# EAGLE board Meter-Daughterboard-Output-v22AM (EAGLE 5.10)
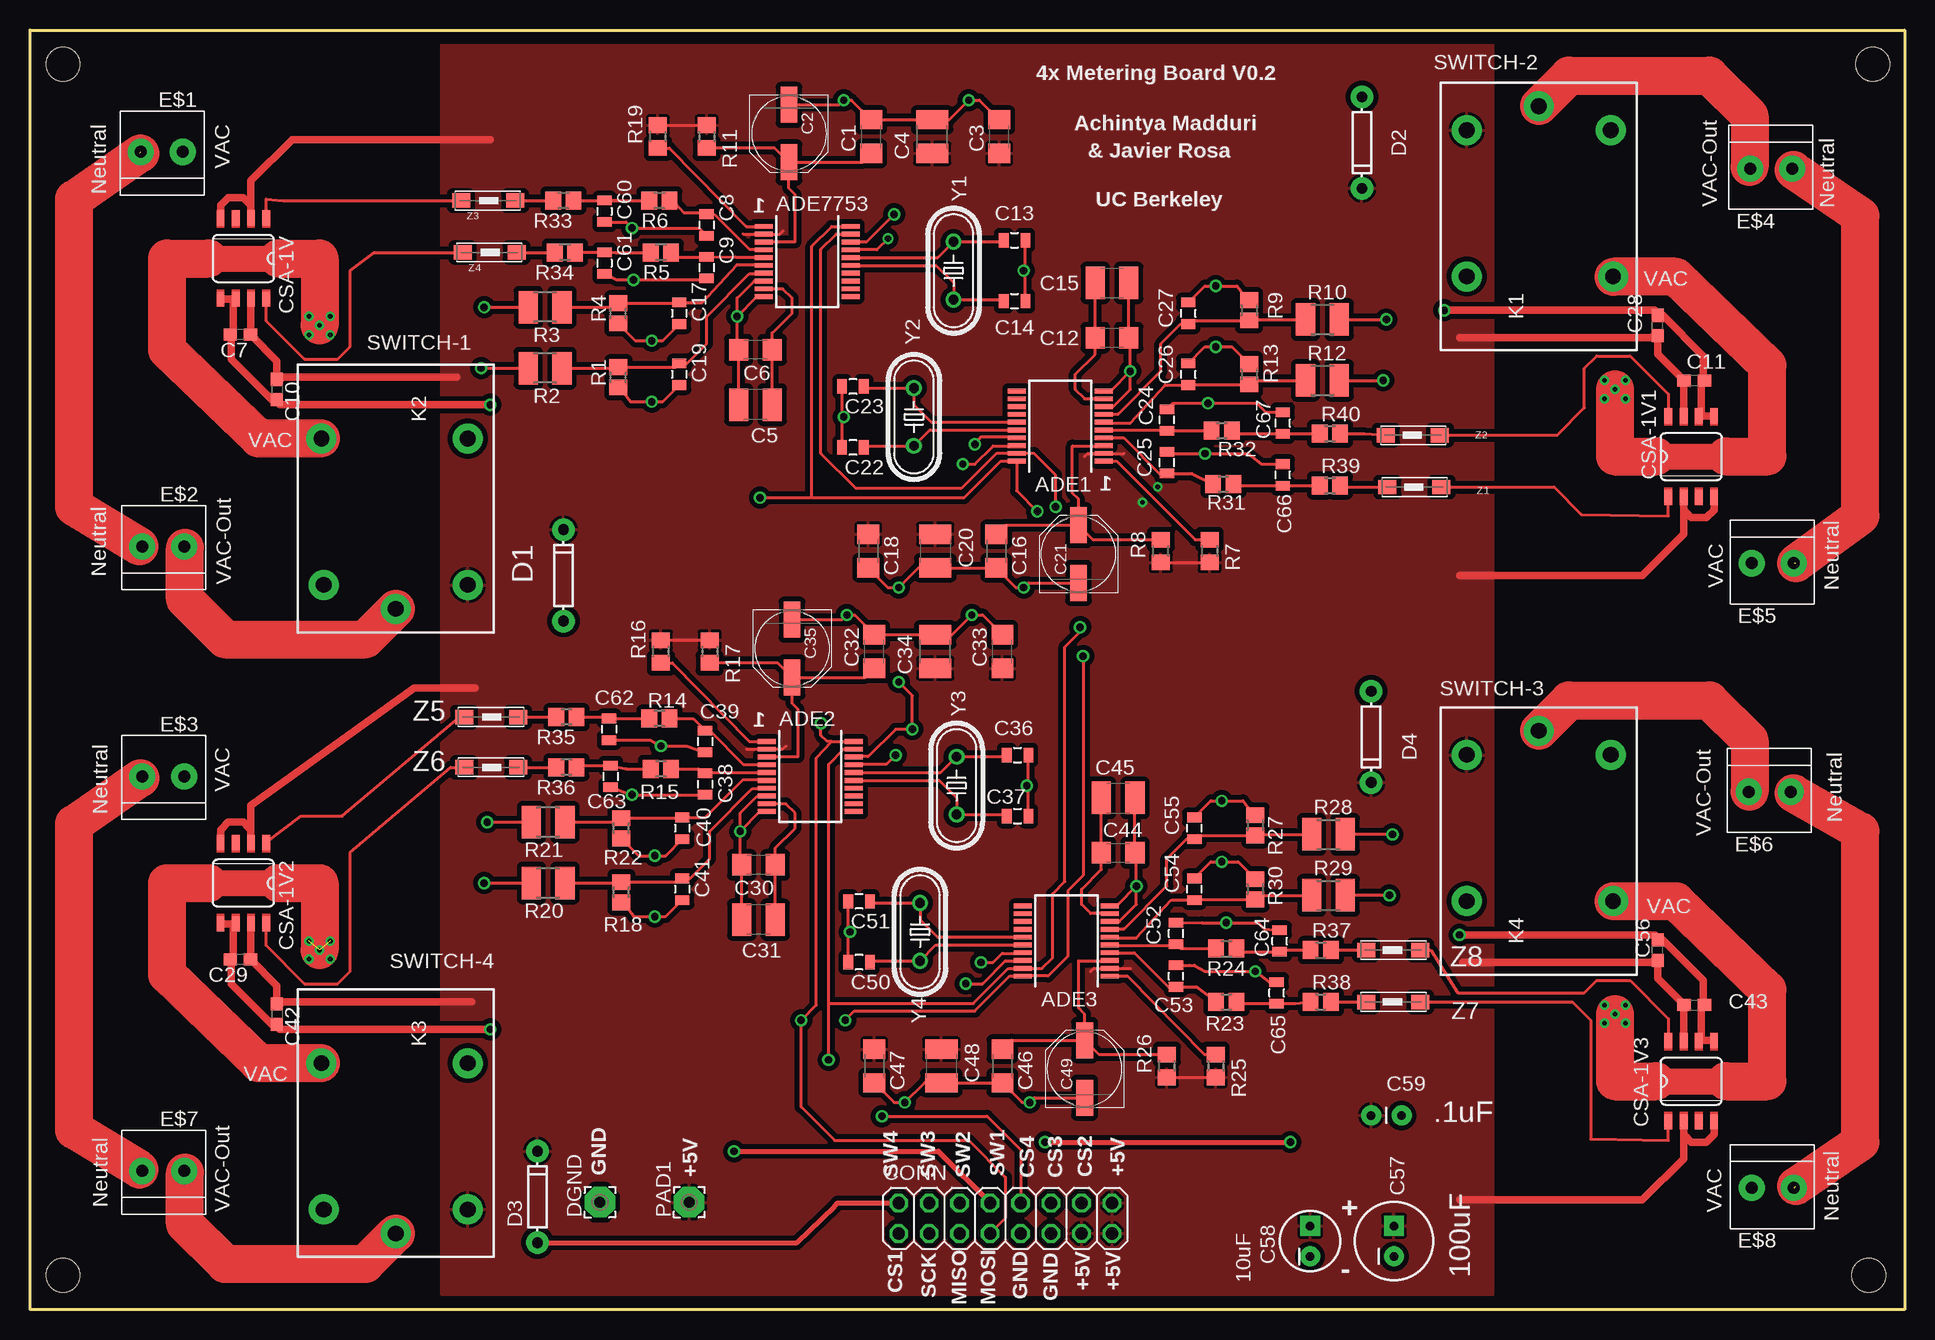
[diagram p0: board, top side]
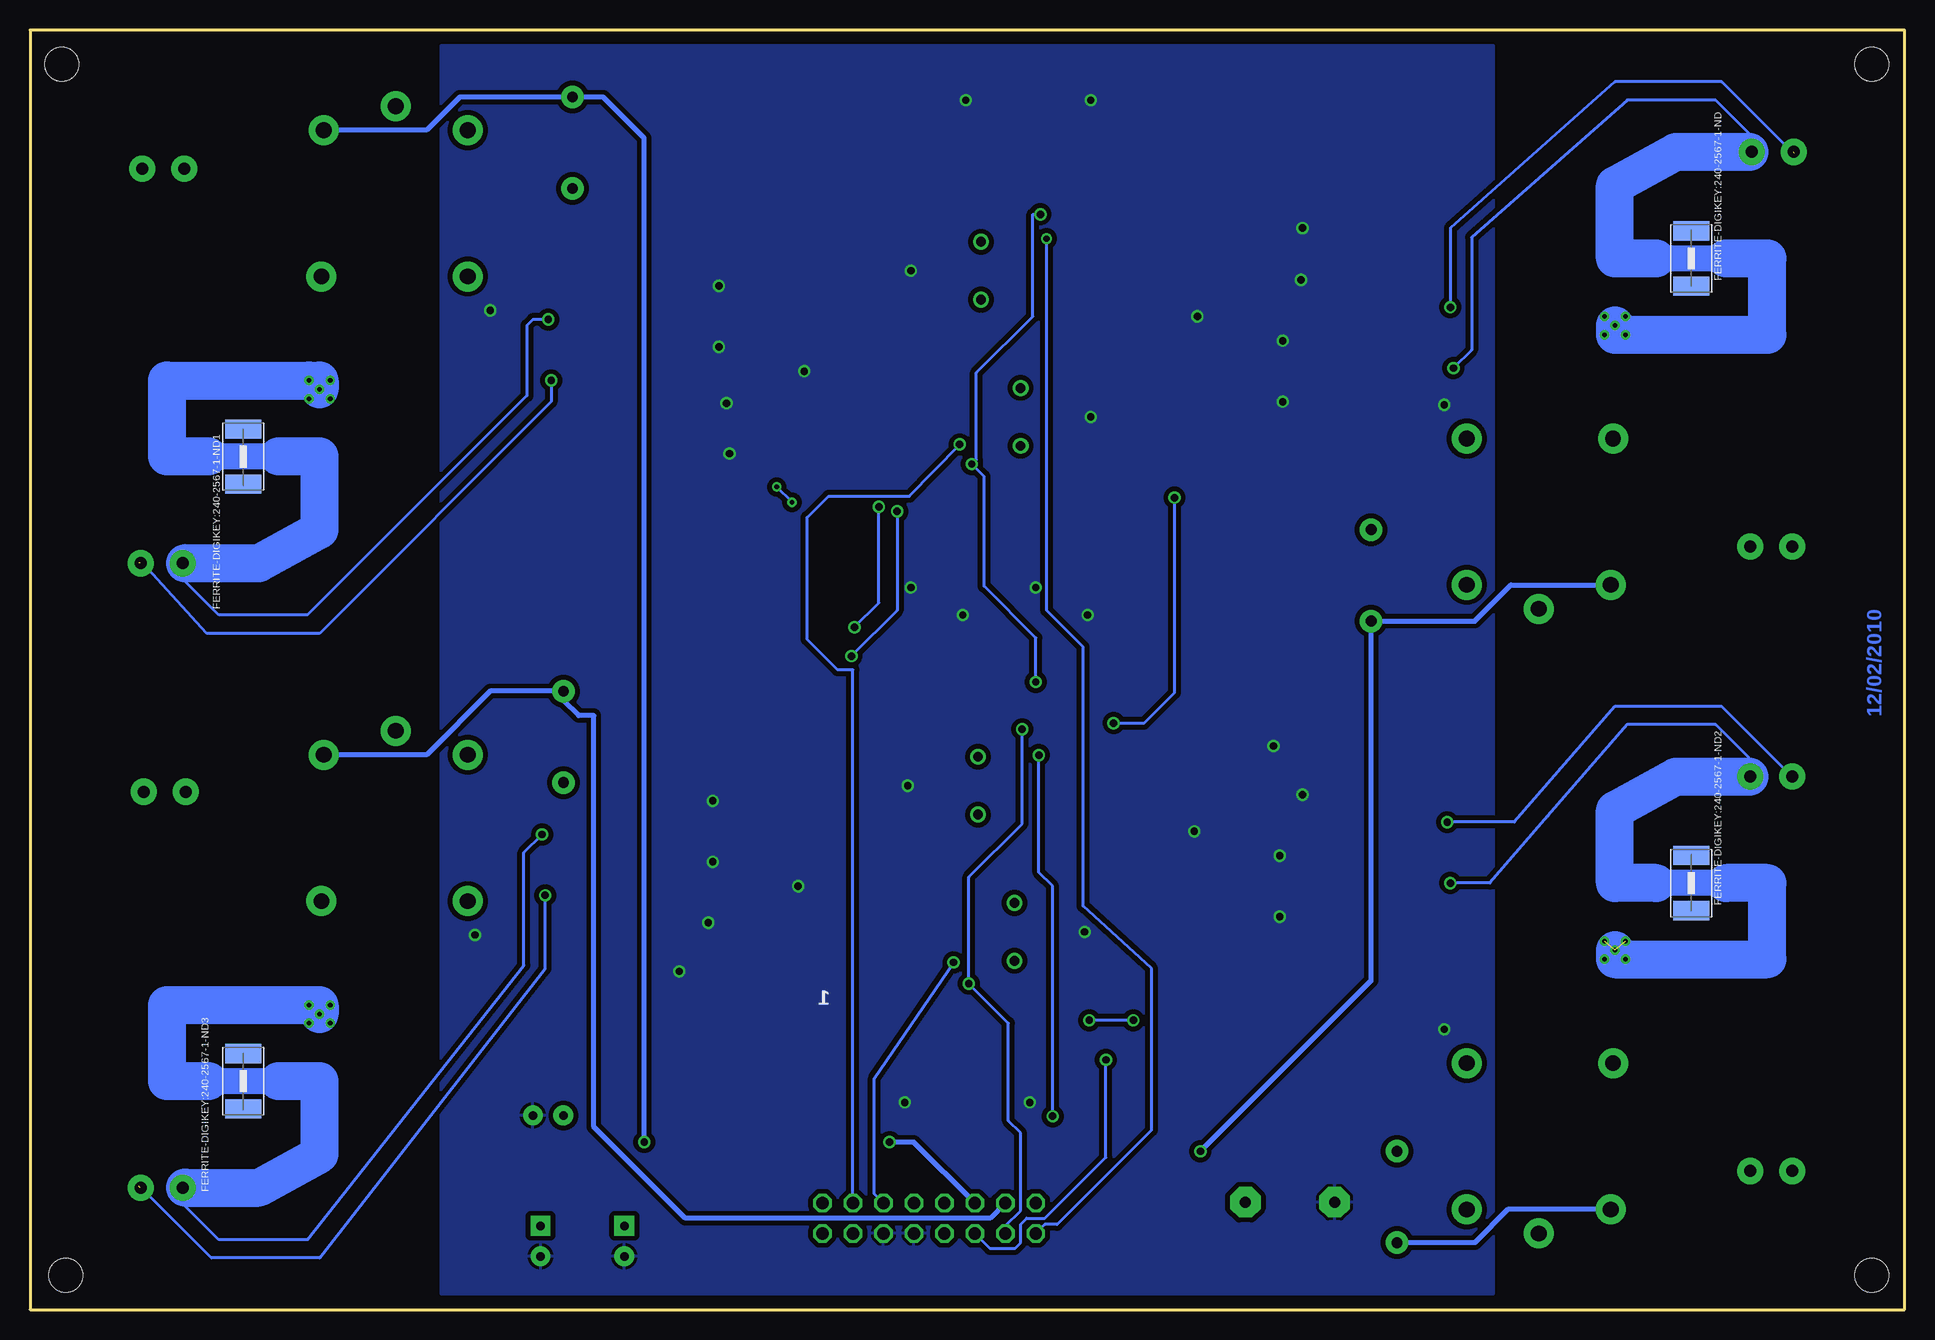
[diagram p1: board, bottom side, seen from below]

Size 156.21 x 106.68 mm. Coordinates in mm from the lower left corner, seen from the top.
Outline: 0,0 0,106.68 156.21,106.68 156.21,0 0,0
Copper layers (1*16): Top 0.035mm / dielectric 1.5mm / Bottom 0.035mm
Design rules "default *": minimum track width 10mil, minimum drill 15mil, track to track 8mil, track to pad 8mil, pad to pad 8mil, via to via 8mil, smd to smd 8mil, copper to edge 40mil, drill to drill 8mil, minimum pad ring 10mil, minimum via ring 8mil, stop-mask expansion 4mil, vias tented up to drill 0mil, thermal gap 10mil
Holes 2.8 mm at 2.74,103.84 2.74,2.87 153.56,103.84 153.24,2.87

## Footprints (pad centres in the part's own frame; a part is rotated, then mirrored left to right if it is on the bottom)
SSOP20 = smd 0.4 x 1.5: 1 -2.925,-3.625; 2 -2.275,-3.625; 3 -1.625,-3.625; 4 -0.975,-3.625; 5 -0.325,-3.625; 6 0.325,-3.625; 7 0.975,-3.625; 8 1.625,-3.625; 9 2.275,-3.625; 10 2.925,-3.625; 11 2.925,3.625; 12 2.275,3.625; 13 1.625,3.625; 14 0.975,3.625; 15 0.325,3.625; 16 -0.325,3.625; 17 -0.975,3.625; 18 -1.625,3.625; 19 -2.275,3.625; 20 -2.925,3.625
C1206 = smd 1.6 x 1.8: 1 -1.4,0; 2 1.4,0
PANASONIC_D = smd 3 x 1.4: + 2.4,0; - -2.4,0
C1210 = smd 1.6 x 2.7: 1 -1.4,0; 2 1.4,0
C0603 = smd 1.1 x 1: 1 -0.85,0; 2 0.85,0
0805 = smd 0.8 x 1.2: 1 -0.9,0; 2 0.9,0
CPOL-RADIAL-100UF-25V = drill 0.7 pad 1.651 square: 1 1.27,0 | drill 0.7 pad 1.651 round: 2 -1.27,0
CPOL-RADIAL-10UF-25V = drill 0.7 pad 1.651 square: 1 1.27,0 | drill 0.7 pad 1.651 round: 2 -1.27,0
CAP-PTH-SMALL = drill 0.7 pad 1.651 round: 1 0,0; 2 2.54,0
2X08 = drill 1.016 octagon: 1 -8.89,-1.27; 2 -8.89,1.27; 3 -6.35,-1.27; 4 -6.35,1.27; 5 -3.81,-1.27; 6 -3.81,1.27; 7 -1.27,-1.27; 8 -1.27,1.27; 9 1.27,-1.27; 10 1.27,1.27; 11 3.81,-1.27; 12 3.81,1.27; 13 6.35,-1.27; 14 6.35,1.27; 15 8.89,-1.27; 16 8.89,1.27
SOIC8 = smd 0.66 x 1.27: 1 -1.905,-3.391; 2 -0.635,-3.391; 3 0.635,-3.391; 4 1.905,-3.391; 5 1.905,3.391; 6 0.635,3.391; 7 -0.635,3.391; 8 -1.905,3.391
DIODE-1N4148 = drill 0.9 pad 1.88 round: A -3.81,0; C 3.81,0
2,54/0,9 = drill 0.914 pad 2.54 octagon: 1 0,0
3.5MMTERM = drill 1 pad 2.184 round: 1 1.8,0; 2 -1.7,0
1812 = smd 1.6 x 3: 1 -2.3,0; 2 2.3,0
ZN5 = drill 1.3 pad 2.5 round: 11 8.89,0; 12 -5.31,-6.2; 14 -5.31,6; A1 6.89,6; A2 6.89,-6
R0805 = smd 1.3 x 1.5: 1 -0.85,0; 2 0.85,0
R1210 = smd 1.6 x 2.7: 1 -1.4,0; 2 1.4,0
R0805' = smd 1.3 x 1.5: 1 -0.95,0; 2 0.95,0
HC49/S = drill 0.813 round: 1 -2.413,0; 2 2.413,0
1806 = smd 1.5 x 1.2: 1 -2.3,0; 2 2.2,0

## Placement (x,y rotation side)
ADE1  ADE7753ARSZ-ND  [SSOP20]  85.85,73.66 90 top
ADE2  ADE7753ARSZ-ND  [SSOP20]  65.02,44.45 270 top
ADE3  ADE7753ARSZ-ND  [SSOP20]  86.36,30.73 90 top
ADE7753  ADE7753ARSZ-ND  [SSOP20]  64.77,87.38 270 top
C1  100n : 399-1249-1-ND  [C1206]  70.1,97.79 90 top
C2  220u : PCE3310CT-ND  [PANASONIC_D]  63.25,98.04 270 top
C3  100n : 399-1249-1-ND  [C1206]  80.77,97.79 90 top
C4  10u : 478-1625-1-ND  [C1210]  75.18,97.79 90 top
C5  10u : 478-1625-1-ND  [C1210]  60.45,75.44 180 top
C6  100n : 399-1249-1-ND  [C1206]  60.45,80.01 180 top
C7  0.1uF : ECJ-1VB1C104K  [C0603]  17.53,81.28 180 top
C8  15nF: PCC1992CT-ND  [0805]  56.39,90.42 270 top
C9  15nF: PCC1992CT-ND  [0805]  56.39,86.87 270 top
C10  0.1uF : ECJ-1VB1C104K  [C0603]  20.57,76.71 270 top
C11  0.1uF : ECJ-1VB1C104K  [C0603]  138.68,77.47 0 top
C12  100n : 399-1249-1-ND  [C1206]  90.17,81.03 0 top
C13  22p : PCC220CNCT-ND  [0805]  82.04,89.15 0 top
C14  22p : PCC220CNCT-ND  [0805]  82.04,84.07 0 top
C15  10u : 478-1625-1-ND  [C1210]  90.17,85.6 0 top
C16  100n : 399-1249-1-ND  [C1206]  80.52,63.25 270 top
C17  15nF: PCC1992CT-ND  [0805]  54.1,83.06 270 top
C18  100n : 399-1249-1-ND  [C1206]  69.85,63.25 270 top
C19  15nF: PCC1992CT-ND  [0805]  54.1,77.98 270 top
C20  10u : 478-1625-1-ND  [C1210]  75.44,63.25 270 top
C21  220u : PCE3310CT-ND  [PANASONIC_D]  87.38,62.99 90 top
C22  22p : PCC220CNCT-ND  [0805]  68.58,71.88 180 top
C23  22p : PCC220CNCT-ND  [0805]  68.58,76.96 180 top
C24  15nF: PCC1992CT-ND  [0805]  94.74,74.17 90 top
C25  15nF: PCC1992CT-ND  [0805]  94.74,70.61 90 top
C26  15nF: PCC1992CT-ND  [0805]  96.52,77.98 90 top
C27  15nF: PCC1992CT-ND  [0805]  96.52,83.06 90 top
C28  0.1uF : ECJ-1VB1C104K  [C0603]  135.64,82.04 90 top
C29  0.1uF : ECJ-1VB1C104K  [C0603]  17.53,29.21 180 top
C30  100n : 399-1249-1-ND  [C1206]  60.71,37.08 180 top
C31  10u : 478-1625-1-ND  [C1210]  60.71,32.51 180 top
C32  100n : 399-1249-1-ND  [C1206]  70.36,54.86 90 top
C33  100n : 399-1249-1-ND  [C1206]  81.03,54.86 90 top
C34  10u : 478-1625-1-ND  [C1210]  75.44,54.86 90 top
C35  220u : PCE3310CT-ND  [PANASONIC_D]  63.5,55.12 270 top
C36  22p : PCC220CNCT-ND  [0805]  82.3,46.23 0 top
C37  22p : PCC220CNCT-ND  [0805]  82.3,41.15 0 top
C38  15nF: PCC1992CT-ND  [0805]  56.26,43.81 270 top
C39  15nF: PCC1992CT-ND  [0805]  56.26,47.37 270 top
C40  15nF: PCC1992CT-ND  [0805]  54.36,40.13 270 top
C41  15nF: PCC1992CT-ND  [0805]  54.36,35.05 270 top
C42  0.1uF : ECJ-1VB1C104K  [C0603]  20.57,24.64 270 top
C43  0.1uF : ECJ-1VB1C104K  [C0603]  138.68,25.4 0 top
C44  100n : 399-1249-1-ND  [C1206]  90.68,38.1 0 top
C45  10u : 478-1625-1-ND  [C1210]  90.68,42.67 0 top
C46  100n : 399-1249-1-ND  [C1206]  81.03,20.32 270 top
C47  100n : 399-1249-1-ND  [C1206]  70.36,20.32 270 top
C48  10u : 478-1625-1-ND  [C1210]  75.95,20.32 270 top
C49  220u : PCE3310CT-ND  [PANASONIC_D]  87.88,20.07 90 top
C50  22p : PCC220CNCT-ND  [0805]  69.09,28.96 180 top
C51  22p : PCC220CNCT-ND  [0805]  69.09,34.04 180 top
C52  15nF: PCC1992CT-ND  [0805]  95.5,31.37 90 top
C53  15nF: PCC1992CT-ND  [0805]  95.5,27.81 90 top
C54  15nF: PCC1992CT-ND  [0805]  97.03,35.05 90 top
C55  15nF: PCC1992CT-ND  [0805]  97.03,40.13 90 top
C56  0.1uF : ECJ-1VB1C104K  [C0603]  135.64,29.97 90 top
C57  100 uF: P5152-ND  [CPOL-RADIAL-100UF-25V]  113.67,5.71 90 top
C58  10 uF: P5148-ND  [CPOL-RADIAL-10UF-25V]  106.68,5.71 90 top
C59  .1 uF: BC1148TR-ND  [CAP-PTH-SMALL]  111.76,16.19 0 top
C60  15nF: PCC1992CT-ND  [0805]  47.88,91.57 270 top
C61  15nF: PCC1992CT-ND  [0805]  47.88,87.25 270 top
C62  15nF: PCC1992CT-ND  [0805]  48.26,48.39 270 top
C63  15nF: PCC1992CT-ND  [0805]  48.39,44.45 270 top
C64  15nF: PCC1992CT-ND  [0805]  104.14,30.73 90 top
C65  15nF: PCC1992CT-ND  [0805]  103.89,26.42 90 top
C66  15nF: PCC1992CT-ND  [0805]  104.39,69.6 90 top
C67  15nF: PCC1992CT-ND  [0805]  104.39,73.91 90 top
CONN  [2X08]  81.28,7.62 0 top
CSA-1V  CSA-1V  [SOIC8]  17.78,87.63 180 top
CSA-1V1  CSA-1V  [SOIC8]  138.43,71.12 0 top
CSA-1V2  CSA-1V  [SOIC8]  17.78,35.56 180 top
CSA-1V3  CSA-1V  [SOIC8]  138.43,19.05 0 top
D1  [DIODE-1N4148]  44.45,61.21 90 top
D2  [DIODE-1N4148]  111,97.28 270 top
D3  [DIODE-1N4148]  42.29,9.4 90 top
D4  [DIODE-1N4148]  111.76,47.75 270 top
DGND  1031K-ND  [2,54/0,9]  47.5,8.95 90 top
E$1  [3.5MMTERM]  10.92,96.52 0 top
E$2  [3.5MMTERM]  11.05,63.63 0 top
E$3  [3.5MMTERM]  11.05,44.45 0 top
E$4  [3.5MMTERM]  145.16,95.12 180 top
E$5  [3.5MMTERM]  145.29,62.23 180 top
E$6  [3.5MMTERM]  145.03,43.18 180 top
E$7  [3.5MMTERM]  11.05,11.56 0 top
E$8  [3.5MMTERM]  145.29,10.16 180 top
FERRITE-DIGIKEY:240-2567-1-ND  1812  [1812]  17.78,87.63 90 bottom
FERRITE-DIGIKEY:240-2567-1-ND1  1812  [1812]  138.43,71.12 270 bottom
FERRITE-DIGIKEY:240-2567-1-ND2  1812  [1812]  17.78,35.56 90 bottom
FERRITE-DIGIKEY:240-2567-1-ND3  1812  [1812]  138.43,19.05 270 bottom
K1  ZNS5106  [ZN5]  125.73,91.44 90 top
K2  ZNS5106  [ZN5]  30.48,67.31 270 top
K3  ZNS5106  [ZN5]  30.48,15.24 270 top
K4  ZNS5106  [ZN5]  125.73,39.37 90 top
PAD1  1031K-ND  [2,54/0,9]  54.93,8.95 90 top
R1  1K : RHM1.00KAECT-ND  [R0805]  49.02,77.72 90 top
R2  1.0M: P1.00MAACT-ND  [R1210]  42.93,78.49 180 top
R3  1.0M: P1.00MAACT-ND  [R1210]  42.93,83.57 180 top
R4  1K : RHM1.00KAECT-ND  [R0805]  49.02,83.06 90 top
R5  1K : RHM1.00KAECT-ND  [R0805]  52.58,88.14 180 top
R6  1K : RHM1.00KAECT-ND  [R0805]  52.45,92.46 180 top
R7  10K : 541-10.0KCCT-ND  [R0805']  98.3,63.25 270 top
R8  10 : P10.0CCT-ND  [R0805']  94.23,63.25 90 top
R9  1K : RHM1.00KAECT-ND  [R0805]  101.6,83.31 270 top
R10  1.0M: P1.00MAACT-ND  [R1210]  107.7,82.55 0 top
R11  10 : P10.0CCT-ND  [R0805']  56.39,97.79 270 top
R12  1.0M: P1.00MAACT-ND  [R1210]  107.7,77.47 0 top
R13  1K : RHM1.00KAECT-ND  [R0805]  101.6,77.98 270 top
R14  1K : RHM1.00KAECT-ND  [R0805]  52.45,49.28 180 top
R15  1K : RHM1.00KAECT-ND  [R0805]  52.58,45.09 180 top
R16  10K : 541-10.0KCCT-ND  [R0805']  52.58,54.86 90 top
R17  10 : P10.0CCT-ND  [R0805']  56.64,54.86 270 top
R18  1K : RHM1.00KAECT-ND  [R0805]  49.28,34.8 90 top
R19  10K : 541-10.0KCCT-ND  [R0805']  52.32,97.79 90 top
R20  1.0M: P1.00MAACT-ND  [R1210]  43.18,35.56 180 top
R21  1.0M: P1.00MAACT-ND  [R1210]  43.18,40.64 180 top
R22  1K : RHM1.00KAECT-ND  [R0805]  49.28,40.13 90 top
R23  1K : RHM1.00KAECT-ND  [R0805]  99.69,25.65 0 top
R24  1K : RHM1.00KAECT-ND  [R0805]  99.69,30.1 0 top
R25  10K : 541-10.0KCCT-ND  [R0805']  98.81,20.32 270 top
R26  10 : P10.0CCT-ND  [R0805']  94.74,20.32 90 top
R27  1K : RHM1.00KAECT-ND  [R0805]  102.11,40.39 270 top
R28  1.0M: P1.00MAACT-ND  [R1210]  108.2,39.62 0 top
R29  1.0M: P1.00MAACT-ND  [R1210]  108.2,34.54 0 top
R30  1K : RHM1.00KAECT-ND  [R0805]  102.11,35.05 270 top
R31  1K : RHM1.00KAECT-ND  [R0805]  99.44,68.83 0 top
R32  1K : RHM1.00KAECT-ND  [R0805]  99.31,73.28 0 top
R33  1K : RHM1.00KAECT-ND  [R0805]  44.45,92.46 180 top
R34  1K : RHM1.00KAECT-ND  [R0805]  44.58,88.14 180 top
R35  1K : RHM1.00KAECT-ND  [R0805]  44.7,49.4 180 top
R36  1K : RHM1.00KAECT-ND  [R0805]  44.7,45.21 180 top
R37  1K : RHM1.00KAECT-ND  [R0805]  107.57,29.97 0 top
R38  1K : RHM1.00KAECT-ND  [R0805]  107.57,25.65 0 top
R39  1K : RHM1.00KAECT-ND  [R0805]  108.33,68.71 0 top
R40  1K : RHM1.00KAECT-ND  [R0805]  108.33,73.03 0 top
Y1  3.579M : X079-ND  [HC49/S]  76.96,86.61 270 top
Y2  3.579M : X079-ND  [HC49/S]  73.66,74.42 90 top
Y3  3.579M : X079-ND  [HC49/S]  77.22,43.69 270 top
Y4  3.579M : X079-ND  [HC49/S]  74.17,31.5 90 top
Z1  240-2418-1-ND  [1806]  115.32,68.58 180 top
Z2  240-2418-1-ND  [1806]  115.19,72.9 180 top
Z3  240-2418-1-ND  [1806]  38.23,92.46 0 top
Z4  240-2418-1-ND  [1806]  38.35,88.14 0 top
Z5  240-2418-1-ND  [1806]  38.48,49.4 0 top
Z6  240-2418-1-ND  [1806]  38.48,45.21 0 top
Z7  240-2418-1-ND  [1806]  113.54,25.65 180 top
Z8  240-2418-1-ND  [1806]  113.54,29.97 180 top

## Library data of the parts
ADE1-ADE3 ADE7753 CSA-1V CSA-1V1-CSA-1V3 = ACMeterEagle
C1-C7 C10-C12 C15 C16 C18 C20 C21 C28-C35 C42-C49 C56 R7 R8 R11 R16 R17 R19 R25 R26 = rcl
C8 C9 C13 C14 C17 C19 C22-C27 C36-C41 C50-C55 C60-C67 = SparkFunEagle-6-6-07
C57-C59 D1-D4 = SparkFun
CONN = pinhead
DGND PAD1 = wirepad
E$1-E$8 R2 R3 R10 R12 R20 R21 R28 R29 = adafruit
FERRITE-DIGIKEY:240-2567-1-ND FERRITE-DIGIKEY:240-2567-1-ND1-FERRITE-DIGIKEY:240-2567-1-ND3 Z1-Z8 = wuerth-elektronik
K1-K4 = relay
R1 R4-R6 R9 R13-R15 R18 R22-R24 R27 R30-R40 = resistor
Y1-Y4 = crystal

## Nets
A-OUT: CSA-1V.1 Z3.1
A-OUT1: CSA-1V1.1 Z1.1
A-OUT2: CSA-1V2.1 Z5.1
A-OUT3: CSA-1V3.1 Z7.1
AVDD: ADE7753.3 C1.1 C2.+ R11.2
AVDD1: ADE1.3 C16.1 C21.+ R8.2
AVDD2: ADE2.3 C32.1 C35.+ R17.2
AVDD3: ADE3.3 C46.1 C49.+ R26.2
CO-COM: CSA-1V.8 Z4.1
CO-COM1: CSA-1V1.8 Z2.1
CO-COM2: CSA-1V2.8 Z6.1
CO-COM3: CSA-1V3.8 Z8.1
CS1: ADE7753.17 CONN.1
CS2: ADE1.17 CONN.14
CS3: ADE3.17 CONN.12
CS4: ADE2.17 CONN.10
DGND: ADE1.8 ADE1.10 ADE2.8 ADE2.10 ADE3.8 ADE3.10 ADE7753.8 ADE7753.10 C1.2 C2.- C3.2 C4.2 C5.2 C6.2 C7.2 C8.2 C9.2 C10.2 C11.2 C12.2 C13.2 C14.2 C15.2 C16.2 C17.2 C18.2 C19.2 C20.2 C21.- C22.2 C23.2 C24.2 C25.2 C26.2 C27.2 C28.2 C29.2 C30.2 C31.2 C32.2 C33.2 C34.2 C35.- C36.2 C37.2 C38.2 C39.2 C40.2 C41.2 C42.2 C43.2 C44.2 C45.2 C46.2 C47.2 C48.2 C49.- C50.2 C51.2 C52.2 C53.2 C54.2 C55.2 C56.2 C57.2 C58.2 C59.2 C60.2 C61.2 C62.2 C63.2 C64.2 C65.2 C66.2 C67.2 CONN.9 CONN.11 CSA-1V1.5 CSA-1V1.6 CSA-1V2.5 CSA-1V2.6 CSA-1V3.5 CSA-1V3.6 CSA-1V.5 CSA-1V.6 DGND.1 R1.1 R4.1 R9.1 R13.1 R18.1 R22.1 R27.1 R30.1
MISO: ADE1.19 ADE2.19 ADE3.19 ADE7753.19 CONN.5
MOSI: ADE1.20 ADE2.20 ADE3.20 ADE7753.20 CONN.7
N$1: C60.1 R6.2 R33.1
N$3: R34.2 Z4.2
N$4: ADE1.16 C22.1 Y2.1
N$7: ADE1.15 C23.1 Y2.2
N$8: R39.2 Z1.2
N$9: R40.2 Z2.2
N$10: ADE7753.16 C13.1 Y1.1
N$11: ADE7753.15 C14.1 Y1.2
N$15: ADE2.16 C36.1 Y3.1
N$16: ADE2.15 C37.1 Y3.2
N$17: R35.2 Z5.2
N$18: R36.2 Z6.2
N$22: ADE3.16 C50.1 Y4.1
N$23: ADE3.15 C51.1 Y4.2
N$24: R38.2 Z7.2
N$25: R37.2 Z8.2
NEUTRAL: E$1.2 R3.2
NEUTRAL1: R12.2
NEUTRAL3: R29.2
REF: ADE7753.9 C5.1 C6.1
REF1: ADE1.9 C12.1 C15.1
REF2: ADE2.9 C30.1 C31.1
REF3: ADE3.9 C44.1 C45.1
RESET_N: ADE7753.1 R19.1
RESET_N1: ADE1.1 R7.1
RESET_N2: ADE2.1 R16.1
RESET_N3: ADE3.1 R25.1
S$1: C61.1 R5.2 R34.1
S$2: C62.1 R14.2 R35.1
S$3: C63.1 R15.2 R36.1
S$4: C65.1 R23.2 R38.1
S$5: C64.1 R24.2 R37.1
S$6: C66.1 R31.2 R39.1
S$7: C67.1 R32.2 R40.1
S$8: R33.2 Z3.2
S$9: R21.2
SCLK: ADE1.18 ADE2.18 ADE3.18 ADE7753.18 CONN.3
SW1: CONN.8 D1.A K2.A2
SW2: CONN.6 D2.A K1.A2
SW3: CONN.4 D4.A K4.A2
SW4: CONN.2 D3.A K3.A2
V1N: ADE7753.5 C9.1 R5.1
V1N1: ADE1.5 C24.1 R32.1
V1N2: ADE2.5 C38.1 R15.1
V1N3: ADE3.5 C52.1 R24.1
V1P: ADE7753.4 C8.1 R6.1
V1P1: ADE1.4 C25.1 R31.1
V1P2: ADE2.4 C39.1 R14.1
V1P3: ADE3.4 C53.1 R23.1
V2N: ADE7753.6 C17.1 R3.1 R4.2
V2N1: ADE1.6 C26.1 R12.1 R13.2
V2N2: ADE2.6 C40.1 R21.1 R22.2
V2N3: ADE3.6 C54.1 R29.1 R30.2
V2P: ADE7753.7 C19.1 R1.2 R2.1
V2P1: ADE1.7 C27.1 R9.2 R10.1
V2P2: ADE2.7 C41.1 R18.2 R20.1
V2P3: ADE3.7 C55.1 R27.2 R28.1
V-AC: E$1.1 K2.12 R2.2
V-AC1: K1.12 R10.2
V-AC2: K3.12 R20.2
V-AC3: K4.12 R28.2
V-AC-OUT: K2.11
V-AC-OUT1: K1.11
V-AC-OUT2: K3.11
V-AC-OUT3: K4.11
VCC: ADE1.2 ADE2.2 ADE3.2 ADE7753.2 C3.1 C4.1 C7.1 C10.1 C11.1 C18.1 C20.1 C28.1 C29.1 C33.1 C34.1 C42.1 C43.1 C47.1 C48.1 C56.1 C57.1 C58.1 C59.1 CONN.13 CONN.15 CONN.16 CSA-1V1.2 CSA-1V1.4 CSA-1V1.7 CSA-1V2.2 CSA-1V2.4 CSA-1V2.7 CSA-1V3.2 CSA-1V3.4 CSA-1V3.7 CSA-1V.2 CSA-1V.4 CSA-1V.7 D1.C D2.C D3.C D4.C K1.A1 K2.A1 K3.A1 K4.A1 PAD1.1 R7.2 R8.1 R11.1 R16.2 R17.1 R19.2 R25.2 R26.1

## Tracks (layer width: path | path; a pad name or v marks a point on that pad's centre or on a via)
A-OUT
  Top 0.254: CSA-1V.1 19.68,92.58 21.08,92.46 Z3.1
A-OUT1
  Top 0.254: CSA-1V1.1 136.53,66.17 129.29,66.29 127.01,68.58 Z1.1
A-OUT2
  Top 0.254: CSA-1V2.1 22.61,41.15 26.04,41.15 35.8,49.4 Z5.1
A-OUT3
  Top 0.254: CSA-1V3.1 136.53,14.1 130.05,14.22 130.05,24.13 128.52,25.65 Z7.1
AVDD
  Top 0.254: R11.2 62.05,96.84 C2.+ | C2.+ 69.36,95.64 C1.1 | C2.+ 63.25,93.47 63.75,92.96 63.75,89.03 61.3,89.03 ADE7753.3
AVDD1
  Top 0.254: R8.2 88.57,64.2 C21.+ | C21.+ 81.26,65.39 C16.1 | C21.+ 87.38,67.56 86.87,68.07 86.87,72.01 89.32,72.01 ADE1.3
AVDD2
  Top 0.254: R17.2 62.3,53.91 C35.+ | C35.+ 69.61,52.72 C32.1 | C35.+ 63.5,50.55 64.01,50.04 64.01,46.1 61.55,46.1 ADE2.3
AVDD3
  Top 0.254: R26.2 89.08,21.27 C49.+ | C49.+ 81.77,22.47 C46.1 | C49.+ 87.88,24.64 87.38,25.15 87.38,29.08 89.83,29.08 ADE3.3
CO-COM
  Top 0.254: CSA-1V.8 19.68,82.42 22.86,79.25 25.65,79.25 26.67,80.26 26.67,86.61 28.7,88.14 Z4.1
CO-COM1
  Top 0.254: CSA-1V1.8 136.53,76.33 133.35,79.5 130.56,79.5 129.54,78.49 129.54,75.18 127.25,72.9 Z2.1
CO-COM2
  Top 0.254: CSA-1V2.8 19.68,30.35 22.86,27.18 25.65,27.18 26.67,28.19 26.67,38.1 35.05,45.21 Z6.1
CO-COM3
  Top 0.254: CSA-1V3.8 136.53,24.26 133.35,27.43 130.56,27.43 129.54,26.42 119,26.42 116.71,29.97 Z8.1
CS1  (via drill 0.51)
  Top 0.254: ADE7753.17 70.57,88.35 v71.5,89.28
  Bottom 0.254: v71.5,89.28 71.5,58.29 68.45,55.24 68.45,33.66 62.74,28.45 62.74,14.99 70.61,7.11 71.63,7.11 CONN.1
CS2  (via drill 0.61)
  Top 0.254: ADE1.17 82.14,72.77 79.25,72.77 v78.74,72.14
  Bottom 0.254: v78.74,72.14 82.93,67.82 89.66,67.82 91.44,66.04 91.44,55.88 88.9,53.34 87.63,53.34 CONN.14
CS3  (via drill 0.61)
  Top 0.254: ADE3.17 82.69,29.72 81.03,29.72 80.26,28.96 v79.25,28.96
  Bottom 0.254: v79.25,28.96 85.85,19.3 85.85,9.65 CONN.12
CS4  (via drill 0.61)
  Top 0.254: v70.99,16.13 79.76,16.13 82.55,13.34 CONN.10 | 68.61,45.47 71.37,45.47 v72.14,46.23 | 68.61,45.47 68.45,45.47 | 68.61,45.47 ADE2.17
  Bottom 0.254: v72.14,46.23 72.14,36.45 70.99,35.31 v70.99,16.13
DGND  (via drill 0.6, 0.61)
  Top 0.254: C14.2 82.94,86.61 | 82.94,86.61 C13.2 | 16.93,84.02 CSA-1V.6 | ADE7753.10 60.58,84.45 v58.93,82.8 | 82.94,86.61 v82.8,86.61 | ADE7753.8 60.35,85.75 58.93,84.33 v58.93,82.8 | C6.2 59.69,80.01 | C5.2 C6.2 | 16.93,81.53 C7.2 16.76,81.19 | C8.2 55.76,90.17 v50.16,90.17 49.67,90.67 C60.2 | C9.2 56.27,85.85 v50.29,85.85 48.88,85.85 C61.2 | R4.1 50.46,80.77 v51.82,80.77 52.72,80.77 C17.2 | R1.1 49.11,76.87 49.28,76.71 50.04,75.69 v51.82,75.69 52.72,75.69 C19.2 | C2.- 67.42,100.44 v67.82,100.84 68.46,100.84 C1.2 C4.2 76.58,99.19 v78.23,100.84 79.12,100.84 C3.2 | v58.93,82.8 58.93,80.13 C6.2 | 67.68,74.42 C23.2 | C22.2 67.68,74.42 | 139.28,74.73 CSA-1V1.6 | ADE1.10 90.05,76.58 v91.69,78.23 | 67.68,74.42 v67.82,74.42 | ADE1.8 90.27,75.28 91.69,76.71 v91.69,78.23 | C12.2 90.93,81.03 | C12.2 C15.2 | 139.28,77.22 C11.2 139.45,77.56 | C25.2 94.98,71.37 v97.92,71.37 101.47,71.37 102.61,70.5 C66.2 | C24.2 95.24,75.56 v98.17,75.56 102.23,75.56 102.99,74.81 C67.2 | R13.1 100.16,80.26 v98.81,80.26 97.91,80.26 C26.2 | R9.1 101.51,84.16 101.35,84.33 100.58,85.34 v98.81,85.34 97.91,85.34 C27.2 | C21.- 83.2,60.59 v82.8,60.2 82.17,60.2 C16.2 C20.2 74.04,61.85 v72.39,60.2 71.5,60.2 C18.2 | v91.69,78.23 91.69,80.9 C12.2 | C37.2 83.2,43.69 | 83.2,43.69 C36.2 | 16.93,31.95 CSA-1V2.6 | ADE2.10 60.83,41.52 v59.18,39.88 | 83.2,43.69 v83.06,43.69 | ADE2.8 60.6,42.83 59.18,41.4 v59.18,39.88 | C30.2 59.94,37.08 | C31.2 C30.2 | 16.93,29.46 C29.2 16.76,29.12 | C39.2 54.75,46.99 v52.58,46.99 51.7,47.49 C62.2 | C38.2 56.02,42.93 v50.16,42.93 50.03,42.93 C63.2 | R22.1 50.71,37.85 v52.07,37.85 52.97,37.85 C40.2 | R18.1 49.36,33.95 49.53,33.78 50.29,32.77 v52.07,32.77 52.97,32.77 C41.2
  Top 0.254: C35.- 67.68,57.52 v68.07,57.91 68.71,57.91 C32.2 C34.2 76.84,56.26 v78.49,57.91 79.38,57.91 C33.2 | v59.18,39.88 59.18,37.21 C30.2 | 68.19,31.5 C51.2 | C50.2 68.19,31.5 | 139.28,22.66 CSA-1V3.6 | ADE3.10 90.56,33.66 v92.2,35.31 | 68.19,31.5 v68.33,31.5 | ADE3.8 90.78,32.36 92.2,33.78 v92.2,35.31 | C44.2 91.44,38.1 | C44.2 C45.2 | 139.28,25.15 C43.2 139.45,25.49 | C53.2 96.64,28.7 97.03,28.7 97.92,28.19 v102.11,28.19 103.24,27.32 C65.2 | C52.2 97.65,32.26 v99.69,32.26 102.36,32.26 102.87,31.75 C64.2 | R30.1 100.67,37.34 v99.31,37.34 98.41,37.34 C54.2 | R27.1 102.02,41.24 101.85,41.4 101.09,42.42 v99.31,42.42 98.41,42.42 C55.2 | C49.- 83.71,17.67 v83.31,17.27 82.67,17.27 C46.2 C48.2 74.55,18.92 v72.9,17.27 72.01,17.27 C47.2 | v92.2,35.31 92.2,37.98 C44.2
  Top 0.61: CSA-1V.6 CSA-1V.5 | v38.35,75.44 20.83,75.44 20.57,75.69 C10.2 20.15,75.86 16.76,79.25 16.76,81.19 | 16.93,81.53 16.93,84.02 | CSA-1V1.6 CSA-1V1.5 | v117.86,83.31 135.38,83.31 135.64,83.06 C28.2 136.06,82.89 139.45,79.5 139.45,77.56 | 139.28,77.22 139.28,74.73 | CSA-1V2.6 CSA-1V2.5 | v38.35,23.37 20.83,23.37 20.57,23.62 C42.2 20.15,23.79 16.76,27.18 16.76,29.12 | 16.93,29.46 16.93,31.95 | CSA-1V3.6 CSA-1V3.5 | v119.13,31.24 135.38,31.24 135.64,30.99 C56.2 136.06,30.82 139.45,27.43 139.45,25.49 | 139.28,25.15 139.28,22.66
  pour Bottom (isolate 0.406): 34.29,63.5 34.29,1.27 121.92,1.27 121.92,105.41 34.29,105.41 34.29,63.5
MISO  (via drill 0.61)
  Top 0.254: ADE7753.19 68.38,89.66 67.18,89.66 65.91,88.39 65.91,71.37 68.83,68.45 77.6,68.45 80.53,71.39 ADE1.19 83.68,71.39 85.47,69.6 v85.47,66.93 | v87.5,56.9 87.5,56.52 86.23,55.24 86.23,35.69 85.22,34.67 85.22,29.34 84.33,28.45 82.75,28.45 ADE3.19 82.72,28.45 81.53,28.45 78.61,25.53 66.55,25.53 | ADE2.19 68.64,46.74 67.82,46.74 66.55,45.47 66.55,25.53 | v66.55,20.83 66.55,25.53
  Bottom 0.254: v85.47,66.93 85.47,58.93 v87.5,56.9 | v66.55,20.83 66.55,12.7 71.63,7.62 73.15,7.62 73.66,7.11 73.66,5.59 74.17,5.08 76.2,5.08 CONN.5
MOSI  (via drill 0.61)
  Top 0.254: ADE7753.20 66.8,90.3 65.15,88.65 65.15,67.69 | 65.15,67.69 77.85,67.69 80.89,70.73 ADE1.20 82.23,68.27 v83.95,66.55 | v87.76,54.48 87.76,36.2 86.49,34.92 86.49,29.46 84.84,27.81 ADE3.20 | ADE2.20 68.52,47.37 66.8,47.37 | 66.8,47.37 65.53,45.97 65.53,25.4 v64.26,24.13 64.26,16.89 67.06,14.1 78.23,14.1 81.28,11.05 81.28,7.62 CONN.7 | 66.8,47.37 66.42,47.37 65.91,47.88 v65.91,48.9 | v60.83,67.69 65.15,67.69 | 82.68,27.81 81.66,27.81 78.74,24.89 68.71,24.89 v67.94,24.13
  Bottom 0.254: v83.95,66.55 83.95,58.29 v87.76,54.48 | v65.91,48.9 63.37,48.9 60.83,51.44 v60.83,67.69 | v64.26,24.13 v67.94,24.13
N$1
  Top 0.254: R6.2 C60.1 48.88,92.46 R33.1
N$2  (via drill 0.38)
  other vias: 23.24,82.8
N$3
  Top 0.254: Z4.2 R34.2
N$4
  Top 0.254: C22.1 69.61,72.01 Y2.1 74.99,73.33 ADE1.16
N$5  (via drill 0.38)
  other vias: 25.02,82.8
N$6  (via drill 0.38)
  other vias: 25.02,81.28
N$7
  Top 0.254: C23.1 69.61,76.83 Y2.2 73.66,75.44 75.11,73.98 ADE1.15
N$8
  Top 0.254: Z1.2 109.44,68.58 R39.2
N$9
  Top 0.254: R40.2 111.21,73.03 Z2.2
N$10
  Top 0.254: C13.1 81.02,89.03 Y1.1 75.64,87.7 ADE7753.16
N$11
  Top 0.254: C14.1 81.02,84.2 Y1.2 76.96,85.6 75.51,87.05 ADE7753.15
N$12  (via drill 0.38)
  other vias: 132.97,75.95
N$13  (via drill 0.38)
  other vias: 131.19,75.95
N$14  (via drill 0.38)
  other vias: 131.19,77.47
N$15
  Top 0.254: C36.1 81.27,46.1 Y3.1 75.89,44.77 ADE2.16
N$16
  Top 0.254: C37.1 81.27,41.27 Y3.2 77.22,42.67 75.76,44.12 ADE2.15
N$17
  Top 0.254: Z5.2 R35.2
N$18
  Top 0.254: Z6.2 R36.2
N$22
  Top 0.254: C50.1 70.11,29.08 Y4.1 75.49,30.41 ADE3.16
N$23
  Top 0.254: C51.1 70.11,33.91 Y4.2 74.17,32.51 75.62,31.06 ADE3.15
N$24
  Top 0.254: R38.2 Z7.2
N$25
  Top 0.254: R37.2 Z8.2
N$26  (via drill 0.38)
  other vias: 132.97,23.88
N$27  (via drill 0.38)
  other vias: 131.19,23.88
N$28  (via drill 0.38)
  other vias: 131.19,25.4
NEUTRAL  (via drill 0.61)  (1 unrouted)
  Top 0.254: 7.41,63.5 9.14,63.63 | v37.85,83.57 R3.2
  Top 3.175: 9.19,96.39 3.68,92.58 3.68,66.93 9.14,63.63
  Bottom 0.254: v37.85,83.57 37.85,90.17 24.13,102.36 15.24,102.36 9.4,96.52 E$1.2
NEUTRAL1  (via drill 0.61)  (1 unrouted)
  Top 0.254: R12.2 v112.78,77.47
  Top 3.175: 147.15,62.23 152.53,66.17 152.53,91.19 146.94,95
  Bottom 0.254: 147.02,62.23 146.81,62.23 141.48,56.39 132.08,56.39 112.78,75.69 v112.78,77.47
NEUTRAL2
  Top 0.254: 7.41,11.43 9.14,11.68
  Top 3.175: 9.19,44.32 3.68,40.51 3.68,14.99 9.14,11.68
NEUTRAL3  (via drill 0.61)  (1 unrouted)
  Top 0.254: 146.94,43.05 148.8,43.18 | v113.28,34.54 R29.2
  Top 3.175: 147.15,10.29 152.53,13.97 152.53,39.88 146.94,43.05
  Bottom 0.254: 147.02,10.16 146.94,10.16 141.1,4.32 132.08,4.32 113.28,28.45 v113.28,34.54
REF
  Top 0.254: C5.1 C6.1 61.85,81.41 63.5,83.06 63.5,84.33 62.74,85.09 61.16,85.09 ADE7753.9
REF1
  Top 0.254: C15.1 C12.1 88.77,79.63 87.12,77.98 87.12,76.71 87.88,75.95 89.47,75.95 ADE1.9
REF2
  Top 0.254: C31.1 C30.1 62.11,38.48 63.75,40.13 63.75,41.4 62.99,42.16 61.41,42.16 ADE2.9
REF3
  Top 0.254: C45.1 C44.1 89.28,36.7 87.63,35.05 87.63,33.78 88.39,33.02 ADE3.9
RESET_N
  Top 0.254: ADE7753.1 61.02,90.3 59.69,90.3 53.27,96.84 R19.1
RESET_N1
  Top 0.254: R7.1 97.09,64.2 90.55,70.74 ADE1.1
RESET_N2
  Top 0.254: ADE2.1 61.28,47.37 59.94,47.37 53.53,53.91 R16.1
RESET_N3
  Top 0.254: ADE3.1 90.11,27.81 91.44,27.81 97.86,21.27 R25.1
S$1
  Top 0.254: R5.2 48.78,88.14 C61.1 45.82,88.15 R34.1
S$2
  Top 0.254: R35.1 48.14,49.4 C62.1 51.97,49.29 R14.2
S$3
  Top 0.254: R15.2 49.67,45.09 C63.1 45.82,45.35 R36.1
S$4
  Top 0.254: R23.2 100.7,25.53 C65.1 105.44,25.52 R38.1
S$5
  Top 0.254: R37.1 104.28,29.97 C64.1 100.94,29.83 R24.2
S$6
  Top 0.254: R31.2 100.45,68.71 C66.1 105.21,68.7 R39.1
S$7
  Top 0.254: R32.2 100.45,73.03 C67.1 105.33,73.01 R40.1
S$8
  Top 0.254: Z3.2 R33.2
S$9  (via drill 0.61)
  Top 0.254: v38.1,40.64 R21.2
  Bottom 0.254: v38.1,40.64 32.51,40.64 24.13,50.29 15.24,50.29 9.4,44.45
SCLK  (via drill 0.61)
  Top 0.254: ADE7753.18 69.7,89 v72.01,91.31 | ADE1.18 82.2,72.01 80.26,72.01 78.74,70.48 v77.72,70.48 | ADE2.18 68.67,46.1 69.85,46.1 72.14,48.39 v73.53,48.39 73.53,51.18 v72.39,52.32 | ADE3.18 82.63,29.08 81.28,29.08 79.38,27.18 v77.98,27.18
  Bottom 0.254: v72.01,91.31 72.64,91.31 72.64,82.8 77.34,78.11 77.34,70.87 v77.72,70.48 76.71,69.47 76.71,60.33 72.39,56.01 v72.39,52.32 | v73.53,48.39 73.53,40.51 77.98,36.07 v77.98,27.18 74.68,23.88 74.68,15.75 73.66,14.73 73.66,8.26 74.93,6.99 CONN.3
SW1  (via drill 0.61)
  Top 0.406: v58.67,13.21 75.69,13.21 CONN.8
  Bottom 0.406: K2.A2 32.8,60.42 35.81,57.4 D1.A 44.45,27.43 v58.67,13.21
SW2  (via drill 0.61)
  Top 0.406: v84.58,13.97 v105.03,13.97
  Bottom 0.406: K1.A2 123.16,98.33 120.4,101.09 D2.A 108.46,101.09 105.03,97.66 v105.03,13.97 | v84.58,13.97 82.55,13.97 CONN.6
SW3
  Bottom 0.406: K4.A2 123.16,46.26 117.86,51.56 D4.A 111.76,50.8 110.49,49.53 109.22,49.53 109.22,15.24 101.6,7.62 76.2,7.62 CONN.4
SW4
  Top 0.406: D3.A 63.9,5.59 67.06,8.64 67.31,8.89 CONN.2
  Bottom 0.406: D3.A 35.81,5.59 33.05,8.35 K3.A2
V1N
  Top 0.254: ADE7753.5 61.2,87.76 58.8,87.76 56.25,87.77 C9.1 56.13,87.76 53.59,87.76 R5.1
V1N1
  Top 0.254: ADE1.5 94.67,73.33 C24.1 97.18,73.27 R32.1
V1N2
  Top 0.254: ADE2.5 56.33,44.77 C38.1 55.7,45.1 R15.1
V1N3
  Top 0.254: R24.1 95.87,30.1 C52.1 95.37,30.47 95.25,30.35 90.04,30.35 ADE3.5
V1P
  Top 0.254: ADE7753.4 61.1,88.39 59.94,88.39 57.01,91.32 C8.1 55.88,91.44 54.48,91.44 53.34,92.71 R6.1
V1P1
  Top 0.254: ADE1.4 91.14,72.69 94.23,69.6 94.63,69.6 C25.1 96.82,69.71 R31.1
V1P2
  Top 0.254: R14.1 55.26,49.28 C39.1 56.63,48.27 59.44,45.47 61.36,45.47 ADE2.4
V1P3
  Top 0.254: ADE3.4 92.03,29.76 94.87,26.92 95.49,26.92 C53.1 97.2,26.91 R23.1
V2N
  Top 0.254: R3.1 48.68,83.57 R4.2 54.05,83.91 C17.1 56.02,83.96 58.93,87.12 60.96,87.12 ADE7753.6
V2N1
  Top 0.254: R12.1 101.94,77.47 R13.2 96.57,77.13 C26.1 94.6,77.08 91.69,73.91 89.66,73.91 ADE1.6
V2N2
  Top 0.254: R21.1 48.93,40.64 R22.2 54.31,40.98 C40.1 56.27,41.03 59.44,44.2 61.22,44.2 ADE2.6
V2N3
  Top 0.254: R29.1 102.45,34.54 R30.2 97.08,34.2 C54.1 95.11,34.15 92.2,30.99 90.17,30.99 ADE3.6
V2P
  Top 0.254: R2.1 48.86,78.49 R1.2 53.8,78.57 C19.1 54.75,78.88 56.39,80.52 56.39,82.8 59.94,86.36 61.1,86.36 ADE7753.7
V2P1
  Top 0.254: R10.1 101.77,82.55 R9.2 96.82,82.46 C27.1 95.87,82.16 94.23,80.52 94.23,78.23 90.68,74.68 89.52,74.68 ADE1.7
V2P2
  Top 0.254: R20.1 49.11,35.56 R18.2 54.05,35.65 C41.1 55,35.95 56.64,37.59 56.64,39.88 60.2,43.43 61.36,43.43 ADE2.7
V2P3
  Top 0.254: R28.1 102.27,39.62 R27.2 97.33,39.54 C55.1 96.38,39.23 94.74,37.59 94.74,35.31 91.19,31.75 90.03,31.75 ADE3.7
V-AC  (via drill 0.38, 0.61)
  Top 0.254: 24.26,72.64 K2.12 | v37.59,78.49 R2.2
  Top 2.159: 14.86,87.63 20.7,87.63
  Top 3.175: v24.13,82.04 24.13,87.63 20.7,87.63 | 14.86,87.63 11.43,87.63 11.43,80.01 19.05,72.64 24.26,72.64
  Bottom 0.254: 12.95,96.52 12.95,98.04 15.75,100.84 23.11,100.84 36.07,89.41 36.07,80.01 v37.59,78.49 | 12.91,96.52 E$1.1
  Bottom 2.159: 14.86,87.63 20.7,87.63
  Bottom 3.175: 12.91,96.52 12.95,96.52 19.05,96.52 24.13,93.73 24.13,87.63 20.7,87.63 | v24.13,82.04 24.13,81.28 v23.24,81.28 11.43,81.28 11.43,87.63 14.86,87.63
V-AC1  (via drill 0.38, 0.61)
  Top 0.254: 131.95,86.11 K1.12 | R10.2 v113.03,82.55
  Top 2.159: 135.51,71.12 141.35,71.12
  Top 3.175: v132.08,76.71 132.08,71.12 135.51,71.12 | 141.35,71.12 144.78,71.12 144.78,78.74 137.16,86.11 131.95,86.11
  Bottom 0.254: 143.26,62.23 143.26,60.71 140.46,57.91 133.1,57.91 114.81,76.2 114.81,82.04 114.3,82.55 v113.03,82.55
  Bottom 2.159: 135.51,71.12 141.35,71.12
  Bottom 3.175: 143.3,62.23 143.26,62.23 137.16,62.23 132.08,65.02 132.08,71.12 135.51,71.12 | v132.08,76.71 132.08,77.47 v132.97,77.47 144.78,77.47 144.78,71.12 141.35,71.12
V-AC2  (via drill 0.38, 0.61)  (2 unrouted)
  Top 0.254: 24.26,20.57 K3.12 | v37.85,35.56 R20.2 | v25.02,29.21 25.4,29.21 v24.13,29.97
  Top 2.159: 14.86,35.56 20.7,35.56
  Top 3.175: v24.13,29.97 24.13,35.56 20.7,35.56 | 14.86,35.56 11.43,35.56 11.43,27.94 19.05,20.57 24.26,20.57
  Bottom 0.254: 12.95,44.45 12.95,45.97 15.75,48.77 23.11,48.77 29.72,41.15 34.54,35.56 v37.85,35.56
  Bottom 2.159: 14.86,35.56 20.7,35.56
  Bottom 3.175: 12.91,44.45 12.95,44.45 19.05,44.45 24.13,41.66 24.13,35.56 20.7,35.56 | v24.13,29.97 24.13,29.21 v23.24,29.21 11.43,29.21 11.43,35.56 14.86,35.56
  other vias: 23.24,30.73 25.02,30.73
V-AC3  (via drill 0.38, 0.61)
  Top 0.254: 131.95,34.04 K4.12 | v113.54,39.62 R28.2
  Top 2.159: 135.51,19.05 141.35,19.05
  Top 3.175: v132.08,24.64 132.08,19.05 135.51,19.05 | 141.35,19.05 144.78,19.05 144.78,26.67 137.16,34.04 131.95,34.04
  Bottom 0.254: 143.26,10.16 143.26,8.64 140.46,5.84 133.1,5.84 115.06,28.7 115.06,38.1 v113.54,39.62
  Bottom 2.159: 135.51,19.05 141.35,19.05
  Bottom 3.175: 143.3,10.16 143.26,10.16 137.16,10.16 132.08,12.95 132.08,19.05 135.51,19.05 | v132.08,24.64 132.08,25.4 v132.97,25.4 144.78,25.4 144.78,19.05 141.35,19.05
V-AC-OUT
  Top 3.175: 12.91,63.5 12.91,59.23 16.26,55.88 27.94,55.88 K2.11
V-AC-OUT1
  Top 3.175: 143.3,95.25 143.3,99.52 139.95,102.87 128.27,102.87 K1.11
V-AC-OUT2
  Top 3.175: 12.91,11.43 12.91,7.16 16.26,3.81 27.94,3.81 K3.11
V-AC-OUT3
  Top 3.175: 143.3,43.18 143.3,47.45 139.95,50.8 128.27,50.8 K4.11
VCC  (via drill 0.38)
  Top 0.254: 137.92,14.48 137.92,15.53 CSA-1V3.2 | 135.29,81.19 C28.1 | C11.1 137.79,77.43 | C43.1 137.79,25.36 | 137.92,66.55 137.92,67.6 CSA-1V1.2 | 135.29,29.12 C56.1 | 88.39,28.19 88.66,28.46 ADE3.2 | R26.1 R25.2 | 90.17,28.45 91.69,28.45 | 62.74,89.92 62.47,89.65 ADE7753.2 60.97,89.65 60.96,89.66 59.44,89.66 | R8.1 R7.2 | 89.66,71.37 91.19,71.37 | R19.2 R11.1 | ADE1.2 88.15,71.39 87.88,71.12 | 18.29,92.2 18.29,91.15 CSA-1V.2 | 62.99,46.99 62.73,46.73 ADE2.2 | C7.1 18.41,81.32 | 59.69,46.74 61.21,46.74 | C10.1 20.92,77.56 | R16.2 R17.1 | 18.29,40.13 18.29,39.08 CSA-1V2.2 | C29.1 18.41,29.25 | C42.1 20.92,25.49
  Top 0.61: CSA-1V3.4 140.34,14.61 139.7,13.97 138.43,13.97 137.92,14.48 | 119.13,9.14 134.37,9.14 137.79,12.57 CSA-1V3.2 | 119.13,81.03 135.13,81.03 135.29,81.19 | CSA-1V1.4 140.34,66.67 139.7,66.04 138.43,66.04 137.92,66.55 | C28.1 135.64,79.67 C11.1 | 137.79,25.36 CSA-1V3.7 | C43.1 135.64,27.6 C56.1 | 137.79,77.43 CSA-1V1.7 | CSA-1V1.2 137.79,64.64 134.37,61.21 119.13,61.21 | 135.29,29.12 135.13,28.96 119.38,28.96 | CSA-1V.4 15.88,92.08 16.51,92.71 17.78,92.71 18.29,92.2 | 38.35,97.54 21.84,97.54 18.41,94.11 CSA-1V.2 | 18.41,81.32 CSA-1V.7 | C7.1 20.57,79.08 C10.1 | 20.92,77.56 21.08,77.72 35.56,77.72 | CSA-1V2.4 15.88,40.01 16.51,40.64 17.78,40.64 18.29,40.13 | 37.08,51.82 32,51.82 18.41,42.04 CSA-1V2.2 | 18.41,29.25 CSA-1V2.7 | C29.1 20.57,27.01 C42.1 | 20.92,25.49 21.08,25.65 36.83,25.65
  Bottom 0.254: v92.71,67.31 v93.98,68.58
  pour Top (isolate 0.406): 34.29,105.41 34.29,1.27 121.92,1.27 121.92,105.41
(copper drawn outside any net)
  shapes: Top area x32

## Text on the board
Bottom: 12/02/2010
tPlace: SWITCH-2 | 4x Metering Board V0.2 | Achintya Madduri | & Javier Rosa | VAC | Neutral | UC Berkeley | VAC-Out | Neutral | VAC | SWITCH-1 | VAC | VAC | Neutral | VAC-Out | Neutral | SWITCH-3 | VAC-Out | Neutral | VAC | Neutral | VAC | SWITCH-4 | VAC | VAC | GND | +5V | SW4 | SW3 | SW2 | SW1 | CS4 | CS3 | CS2 | +5V | Neutral | VAC-Out | + | Neutral | CS1 | SCK | MISO | MOSI | GND | GND | +5V | +5V | -
tNames: 1 | 1 | 1 | .1uF | 100uF | 10uF
bNames: 1
_tsilk: VAC-Out | Neutral | VAC | C2 | SWITCH-2 | R11 | D2 | R19 | C1 | C3 | PWR_OUT1 | C4 | PWR_INPUT | Y1 | C8 | ADE7753 | Z3 | R6 | 1 | C13 | VAC-Out | CSA-1V | C9 | VAC | Neutral | Z4 | R5 | C17 | C15 | R9 | R10 | K1 | R3 | R4 | C7 | C19 | C14 | C28 | Y2 | C12 | C27 | C6 | R13 | R12 | C11 | C10 | R2 | R1 | K2 | C23 | C26 | C5 | R14 | Z2 | VAC | C22 | C24 | Neutral | R15 | ADE1 | Z1 | CSA-1V1 | VAC-Out | SWITCH-1 | 1 | C25 | C18 | C20 | C16 | R7 | PWR_INPUT1 | R8 | PWR_OUT | D1 | C21 | Neutral | VAC | C35 | SWITCH-3 | R17 | VAC-Out | VAC-Out | R16 | C32 | C33 | C34 | Neutral | Y3 | C39 | VAC | Z5 | R24 | 1 | ADE2 | C36 | D4 | C38 | Z6 | C45 | R23 | PWR_OUT3 | PWR_INPUT2 | C40 | C37 | R27 | R28 | R21 | R22 | C44 | VAC-Out | C41 | C55 | CSA-1V2 | C30 | R30 | R29 | VAC | Neutral | R20 | R18 | C51 | C54 | C31 | R31 | Z8 | K4 | C29 | C56 | C50 | C52 | ADE3 | R32 | Z7 | C42 | C43 | K3 | Y4 | C53 | C47 | C48 | C46 | R25 | R26 | VAC | C49 | C59 | .1uF | CSA-1V3 | SW3 | CS2 | SW4 | SW2 | SW1 | CS4 | CS3 | GND | +5V | PWR_INPUT3 | PWR_OUT2 | C57 | DGND | PAD1 | + | D3 | VAC-Out | VAC | C58 | Neutral | CS1 | - | 100uF | Neutral | VAC-Out | SWITCH-4 | 10uF | E$1
_bsilk: FERRITE-DIGIKEY:240-2567-1-ND | FERRITE-DIGIKEY:240-2567-1-ND1 | FERRITE-DIGIKEY:240-2567-1-ND2 | 1 | FERRITE-DIGIKEY:240-2567-1-ND3